# Altium PCB PCB1.PcbDoc
Units mm, origin at the board's own origin, x right, y up, seen from the top; angles counter-clockwise.
Board outline 53.09 x 47.5 mm, 4 copper layers (Top, Int1 (GND), Int2 (PWR), Bottom Layer), stack 1.591 mm thick; 51 components, 39 nets, 191 pads, 70 vias.
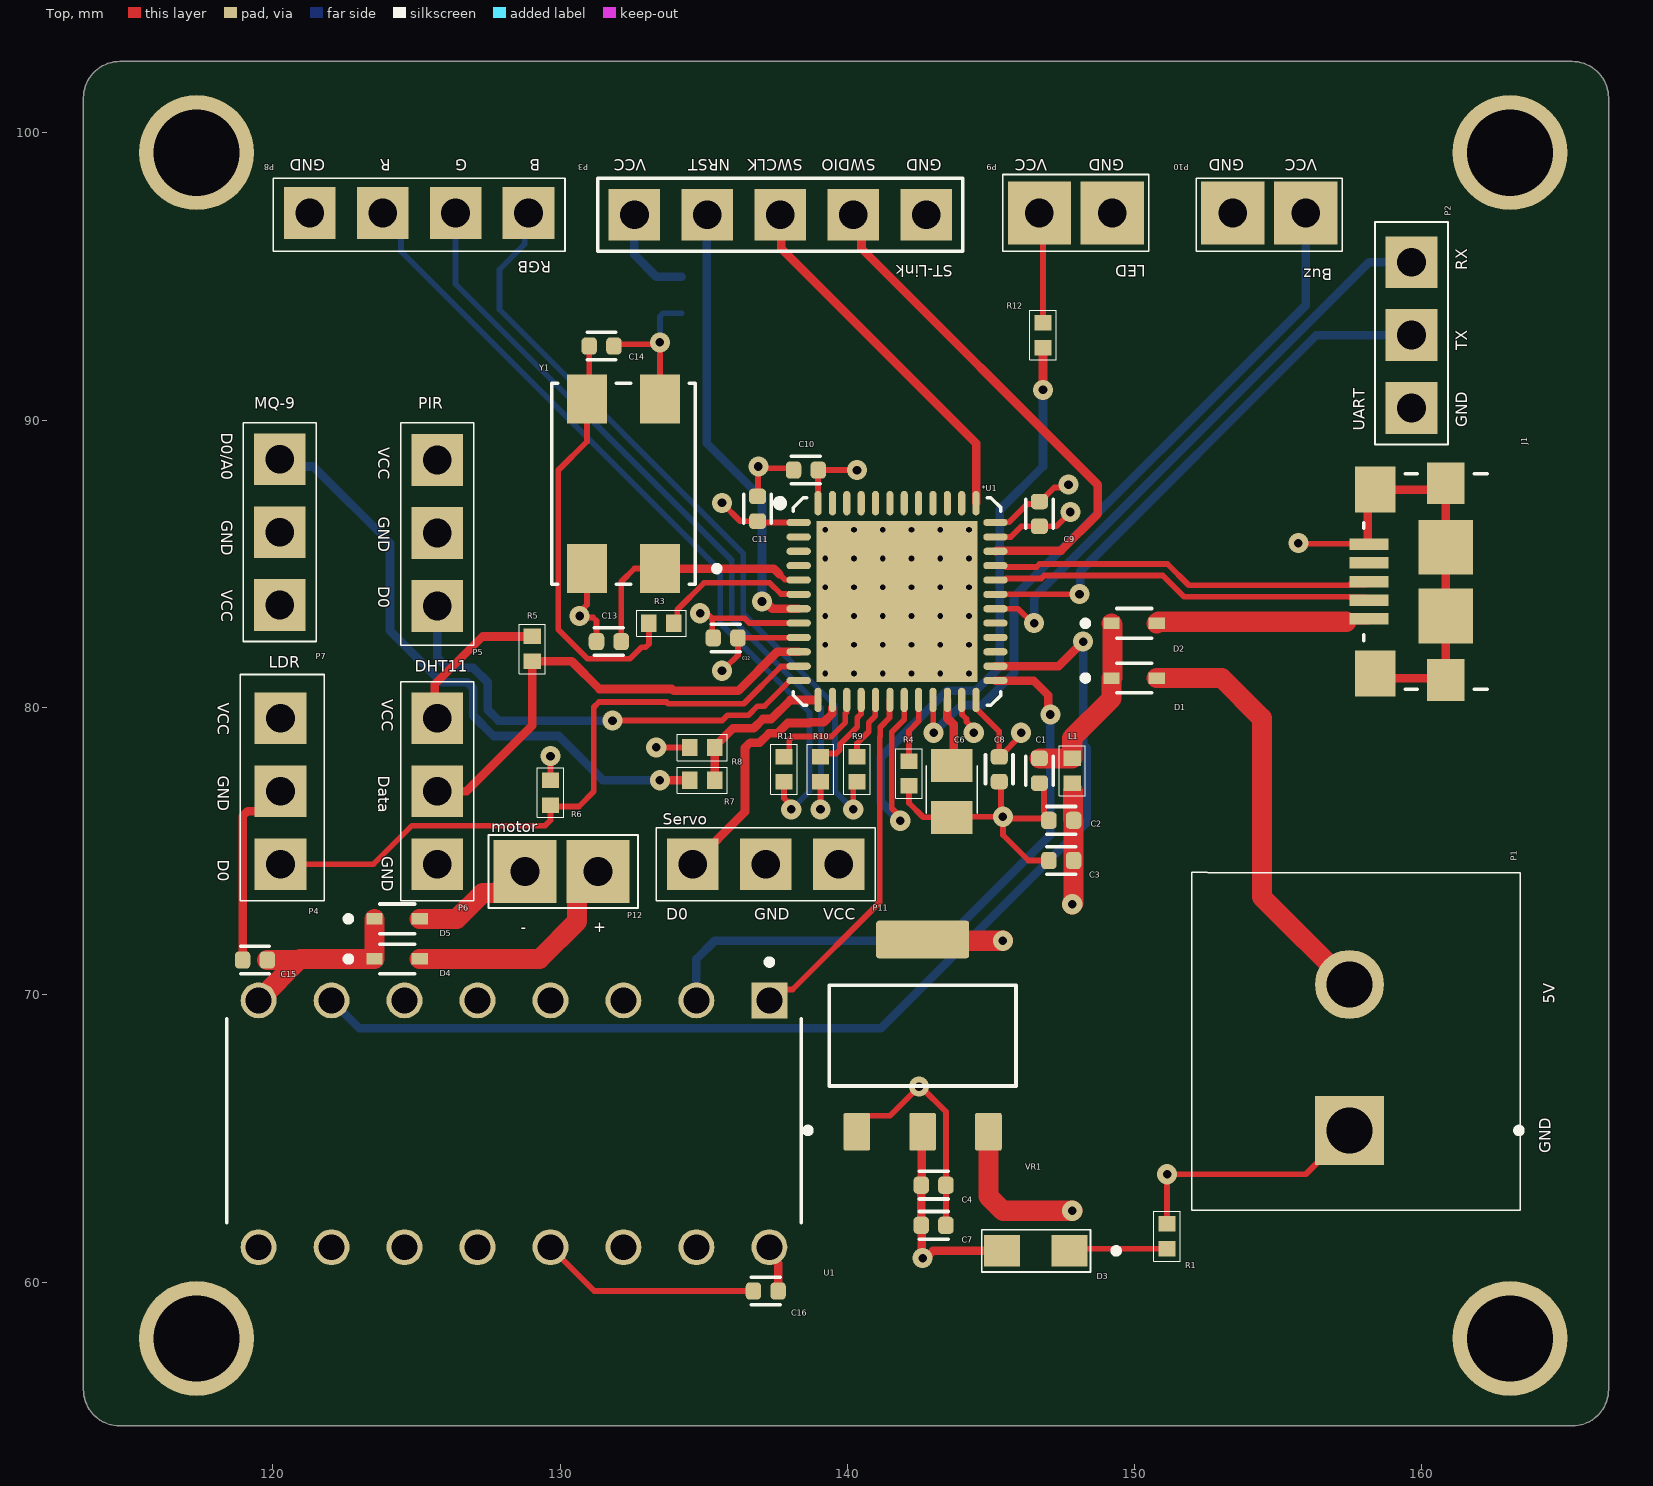
[diagram p0: Top view]
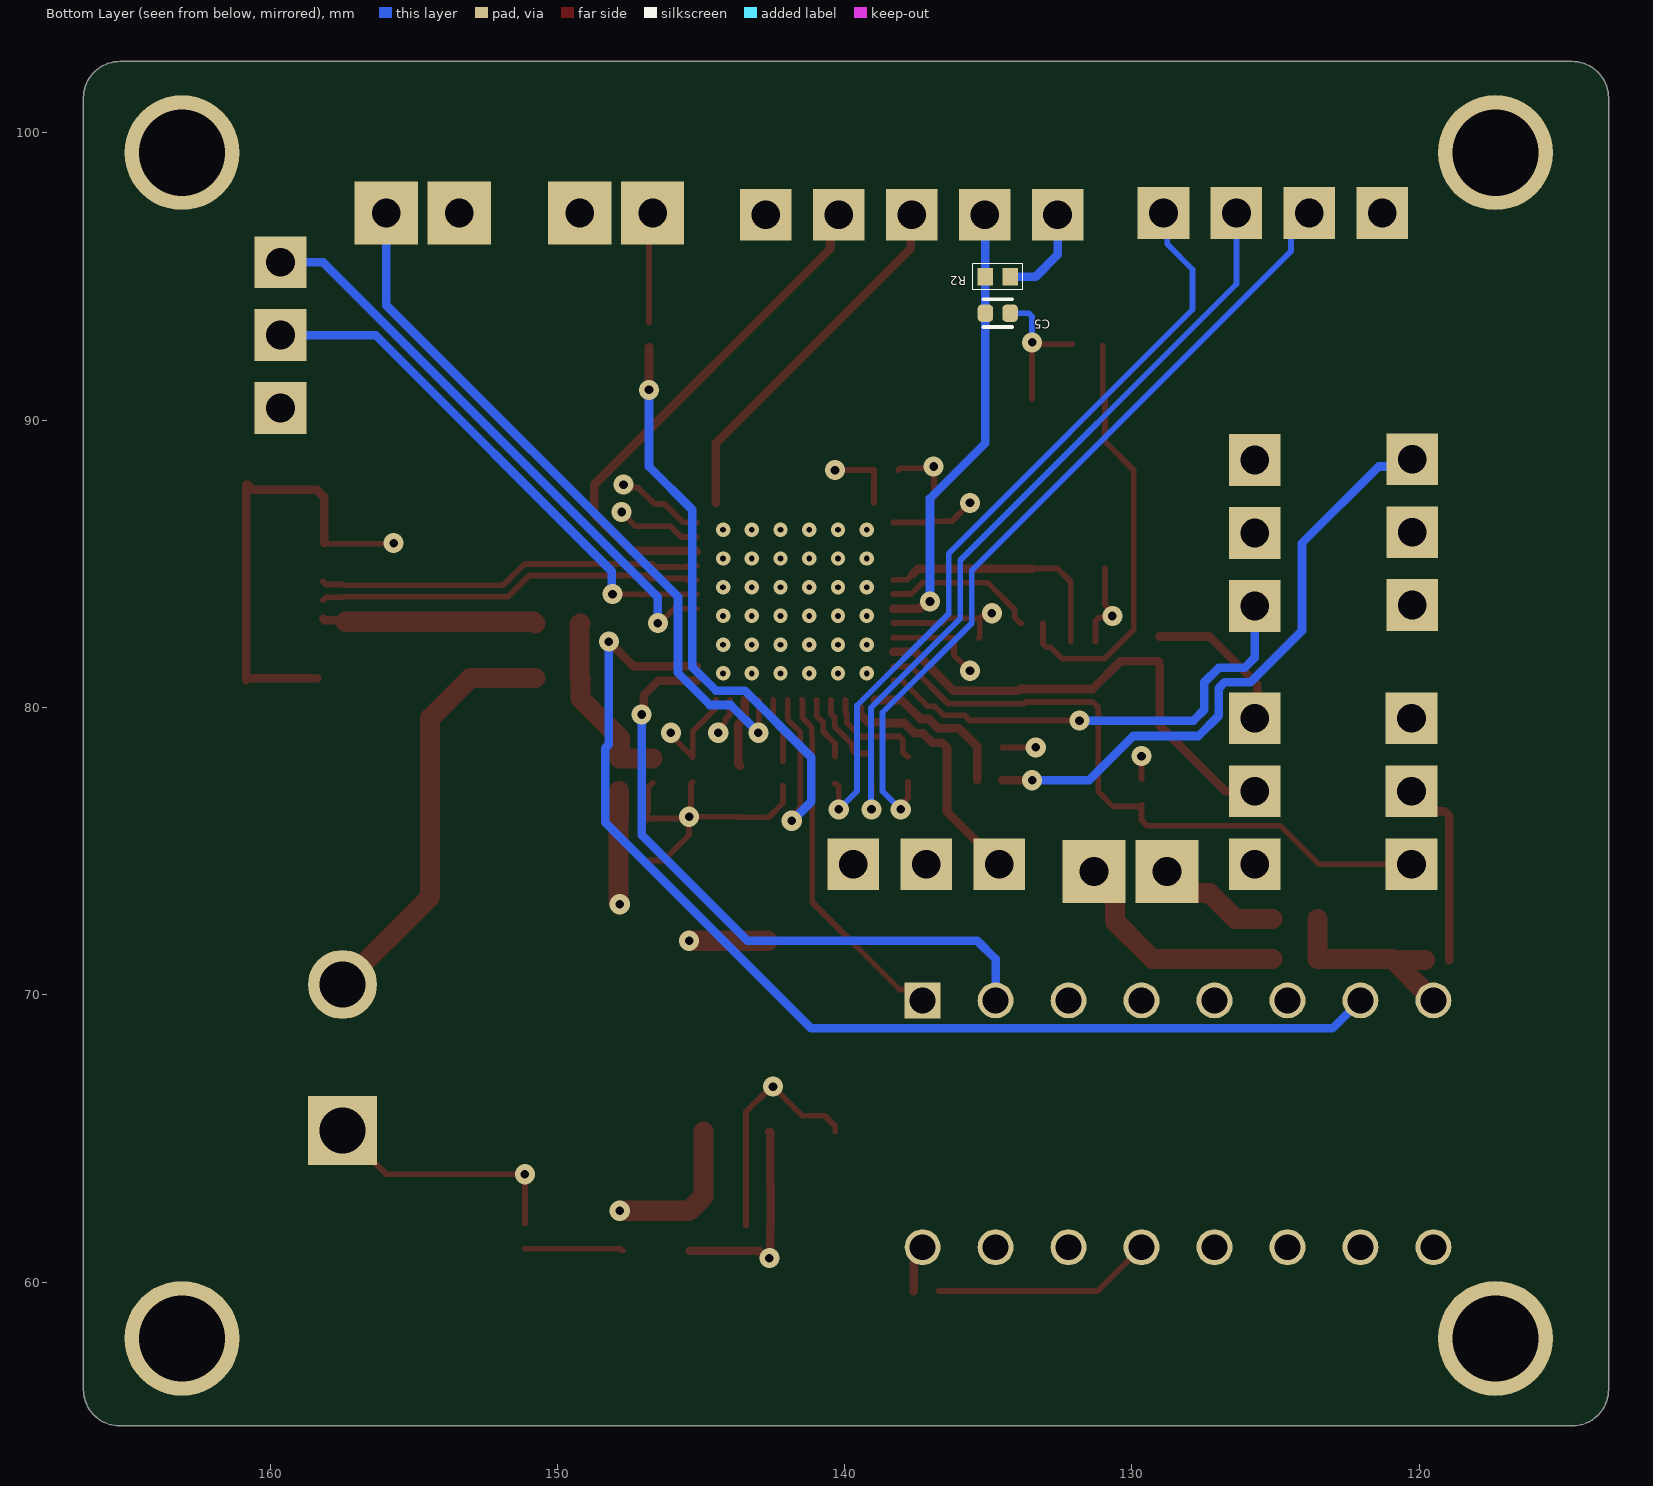
[diagram p1: Bottom Layer view, seen from below]
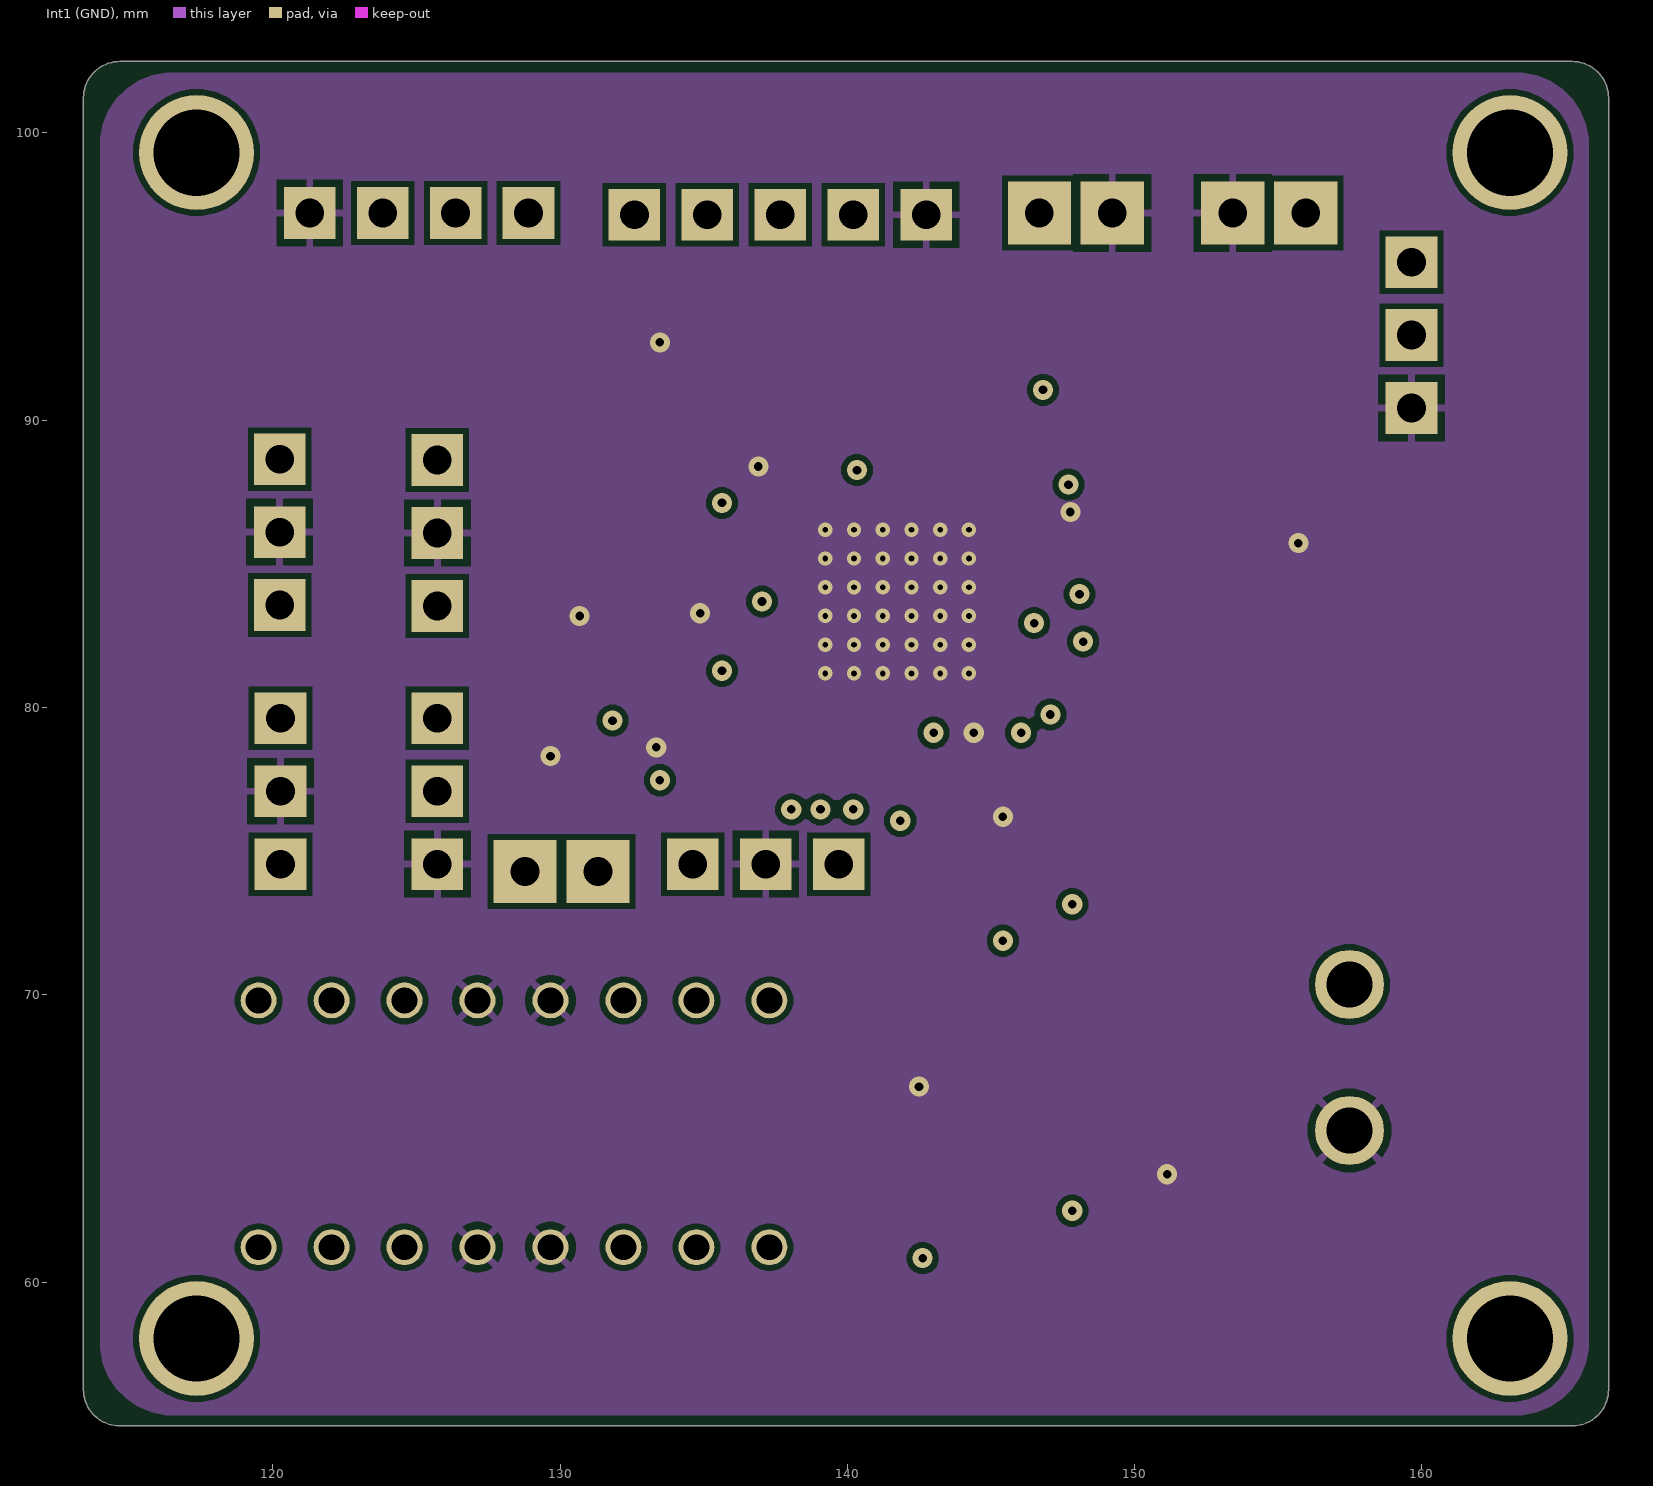
[diagram p2: Int1 (GND)]
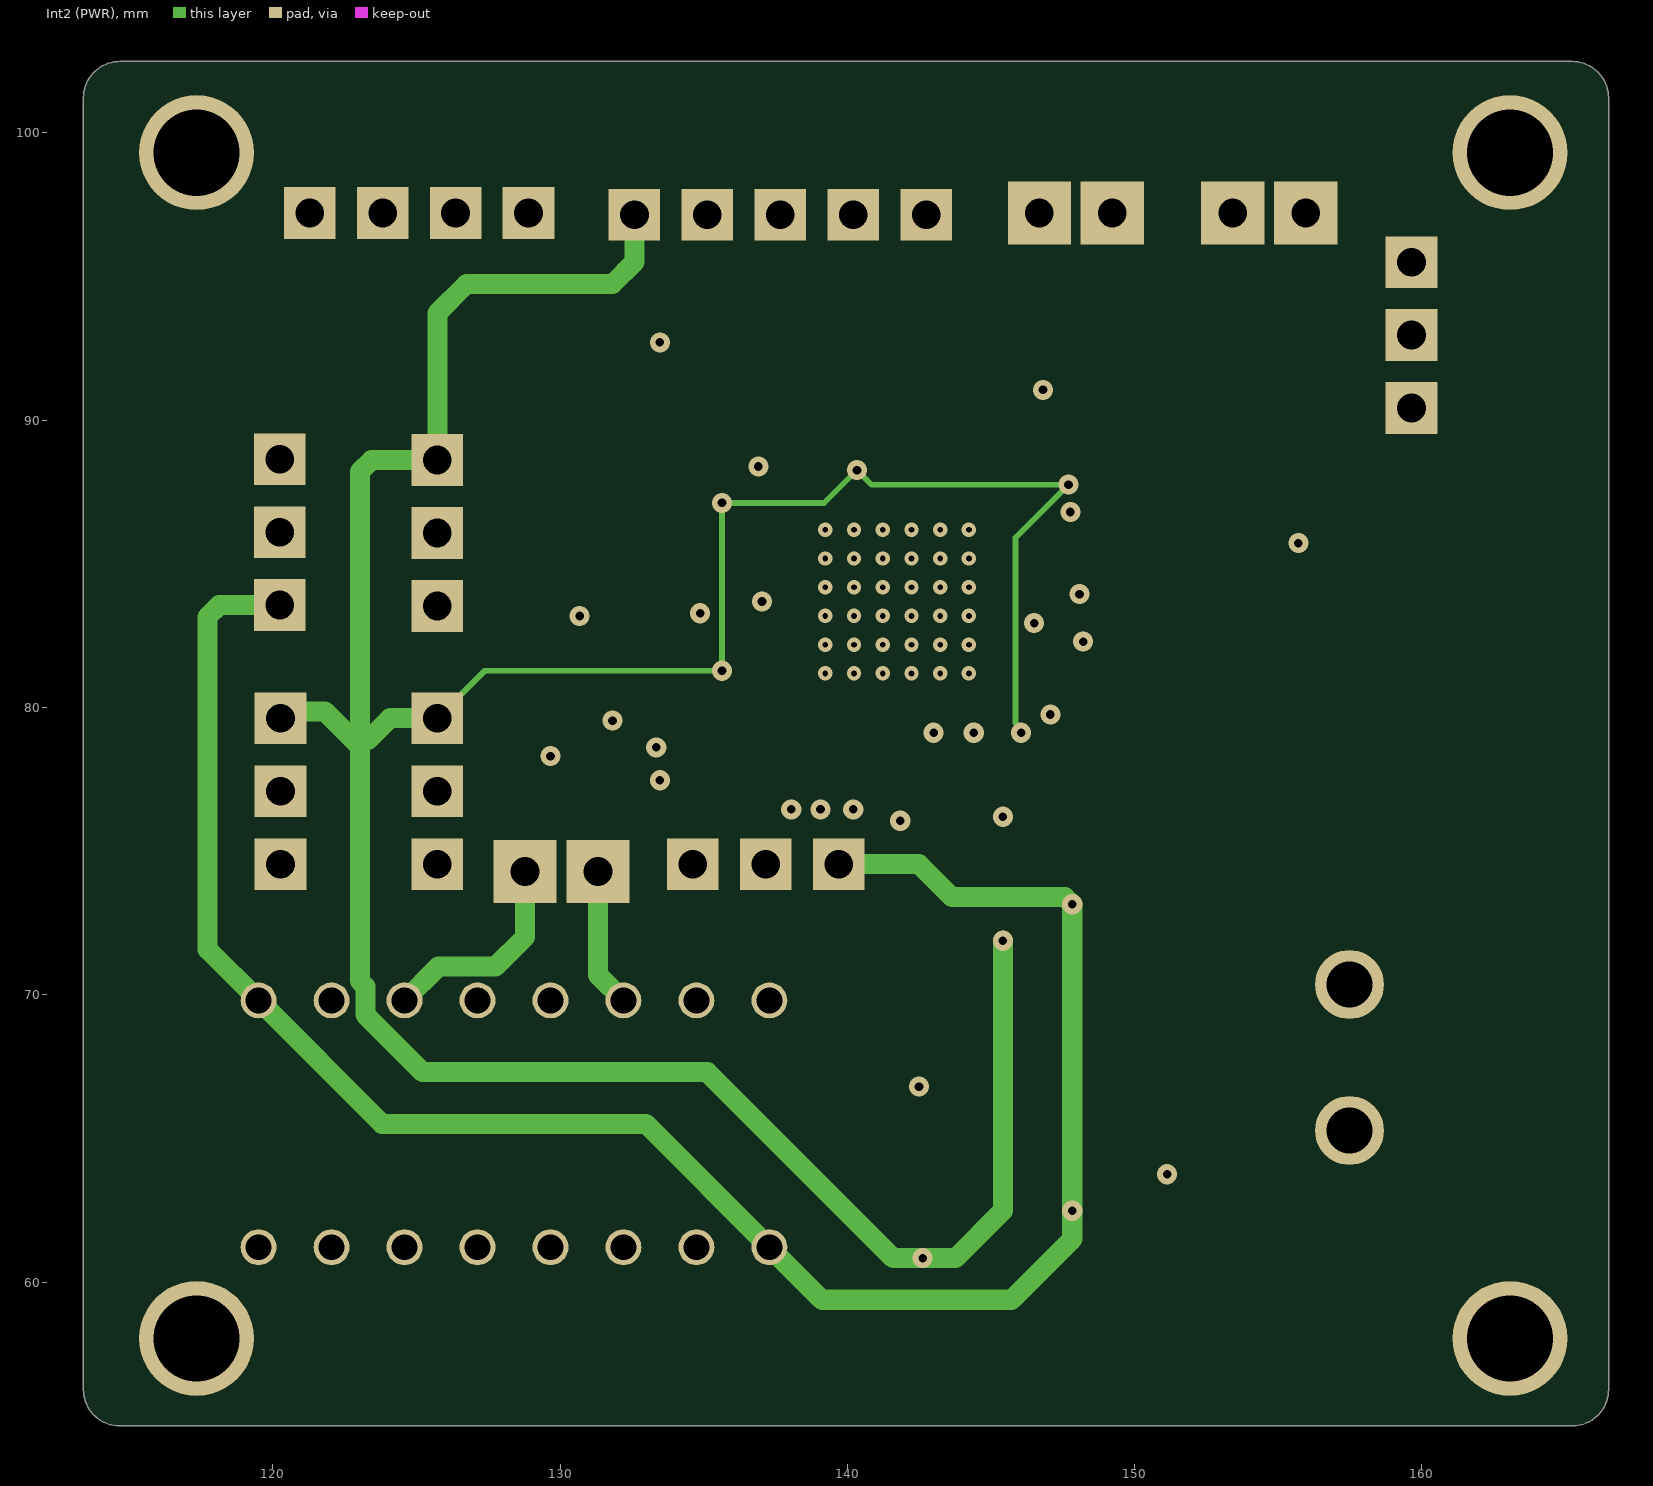
[diagram p3: Int2 (PWR)]
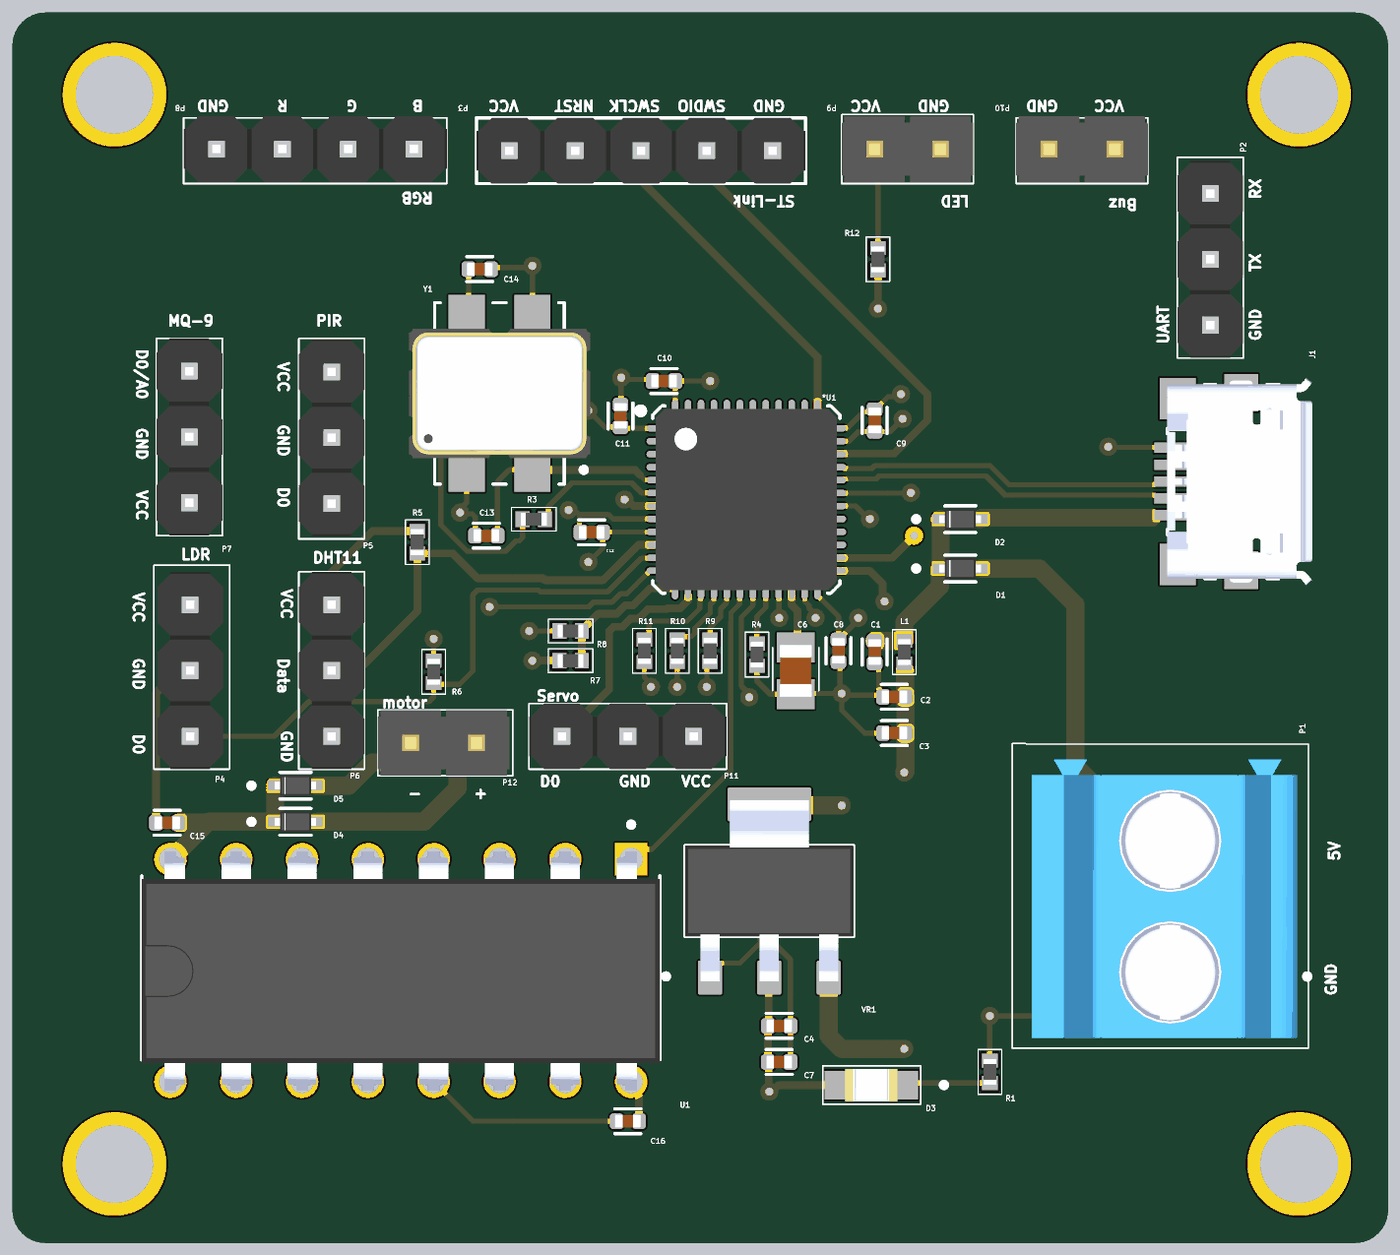
[diagram p4: 3D render of the assembled board from above, using the file's embedded part models]

## Layer stack, top to bottom
Top Solder: solder mask 0.0254, SM-001, Dk 4
Top: signal copper 0.035
Dielectric 2: prepreg 0.2104, PP-017, Dk 4.3
Int1 (GND): signal copper 0.0175
Dielectric 3: core 1.065, Core-039, Dk 4.6
Int2 (PWR): signal copper 0.0175
Dielectric 4: prepreg 0.2104, PP-017, Dk 4.3
Bottom Layer: signal copper 0.035
Bottom Solder: solder mask 0.0254, SM-001, Dk 4

## Board outline
113.411,56.261 113.411,101.219 cw(c114.681,101.219) 114.681,102.489 165.227,102.489 cw(c165.227,101.219) 166.497,101.219 166.497,56.261 cw(c165.227,56.261) 165.227,54.991 114.681,54.991 cw(c114.681,56.261)

## Design rules (kind name [scope] priority, off if disabled: settings)
Clearance Clearance_1 [All] p1: gap=0.2 ignorepadtopadclearanceinfootprint=FALSE
ComponentClearance [All] p1: gap=0.102 collisioncheckmode=3 verticalgap=0.102 showdistances=TRUE
DiffPairsRouting [All] p1: maxlimit=0.2 minlimit=0.2 mostfreqgap=0.2 toplayer_minwidth=0.2 toplayer_maxwidth=0.2 toplayer_prefwidth=0.2 midlayer1_minwidth=0.2 midlayer1_maxwidth=0.2 midlayer1_prefwidth=0.2 midlayer2_minwidth=0.2 midlayer2_maxwidth=0.2 midlayer2_prefwidth=0.2 bottomlayer_minwidth=0.2 bottomlayer_maxwidth=0.2 bottomlayer_prefwidth=0.2 maxuncoupledlength=0.5
Height [All] p1: minheight=0 maxheight=1816.048 prefheight=12.7
HoleSize [All] p1: absolutevalues=TRUE maxlimit=6.3 minlimit=0.2 maxpercent=80.000 minpercent=20.000
HoleToHoleClearance [All] p1: gap=0.25 allowstackedmicrovias=FALSE
MatchedLengths [InDifferentialPair('USB_D')] p1: tolerance=0.5 checknetsindiffpair=FALSE checkdiffpairvsdiffpair=TRUE checkxsignals=TRUE checkothers=TRUE
MinimumAnnularRing [All] p1: minimumring=0.076
MinimumSolderMaskSliver [All] p1: minsoldermaskwidth=0
PlaneClearance [All] p1: clearance=0.102
PlaneConnect PlaneConnectPowerPads [InPadClass('PowerPads')] p1: planeconnectstyle=Direct reliefexpansion=0.508 reliefentries=4 reliefconductorwidth=0.254 reliefairgap=0.254
PlaneConnect [All] p2: pad.planeconnectstyle=Relief pad.reliefexpansion=0.3 pad.reliefentries=4 pad.reliefconductorwidth=0.102 pad.reliefairgap=0.102 via.planeconnectstyle=Direct via.reliefexpansion=0.3 via.reliefentries=4 via.reliefconductorwidth=0.127 via.reliefairgap=0.127
PolygonConnect PolygonConnectPowerPads [All] p1: thpad.connectstyle=Relief thpad.reliefconductorwidth=0.254 thpad.reliefentries=4 thpad.polygonreliefangle="90 Angle" thpad.airgapwidth=0.254 thpad.conductorbypadedge=TRUE thpad.mindistance=0.381 thpad.enablemindistance=FALSE smdpad.connectstyle=Direct smdpad.reliefconductorwidth=0.254 smdpad.reliefentries=4 smdpad.polygonreliefangle="90 Angle" smdpad.airgapwidth=0.254 via.connectstyle=Direct via.reliefconductorwidth=0.254 via.reliefentries=4 via.polygonreliefangle="90 Angle" via.airgapwidth=0.254
PolygonConnect [All] p2: thpad.connectstyle=Relief thpad.reliefconductorwidth=0.102 thpad.reliefentries=4 thpad.polygonreliefangle="90 Angle" thpad.airgapwidth=0.102 smdpad.connectstyle=Relief smdpad.reliefconductorwidth=0.102 smdpad.reliefentries=4 smdpad.polygonreliefangle="90 Angle" smdpad.airgapwidth=0.102 via.connectstyle=Direct via.reliefconductorwidth=0.127 via.reliefentries=4 via.polygonreliefangle="90 Angle" via.airgapwidth=0.127
RoutingVias [All] p1: holewidth=0.3 width=0.7 viastyle="Through Hole" minholewidth=0.15 minwidth=0.25 maxholewidth=0.3 maxwidth=0.7
SilkToSilkClearance [All] p1 off: silktosilkclearance=0.254
SilkToSolderMaskClearance [IsPad] p1 off: minsilkscreentomaskgap=0.254 clearancetoexposedcopper=TRUE
SolderMaskExpansion [All] p1: expansion=0.075 istentingtop=FALSE
SupplyNets "Schematic Supply Nets_3" [InNet('VBUS')] p1: voltage=0.000
SupplyNets "Schematic Supply Nets_2" [InNet('+3V3')] p2: voltage=0.000
SupplyNets "Schematic Supply Nets_1" [InNet('+5V')] p3: voltage=0.000
SupplyNets "Schematic Supply Nets" [InNet('GND')] p4: voltage=0.000
Width [All] p1: maxlimit=0.7 minlimit=0.2 preferedwidth=0.3
20 further rules are at their usual default settings.

## Classes and differential pairs
component class Sensors: P4 P5 P6 P7 R5 R6 R7 R8
component class Power: C1 C2 C3 C4 D1 D2 D3 J1 L1 P1 R1 VR1
component class Microcontroller: *U1 C5 C6 C7 C8 C9 C10 C11 C12 C13 C14 P2 P3 R2 R3 R4 Y1
component class Actuators: C15 C16 D4 D5 P8 P9 P10 P11 P12 R9 R10 R11 R12 U1
differential pair USB_D: +USB_D_P -USB_D_N

## Components (designator, comment, footprint, x,y, rotation, side; value= is the part's Value field where it differs from the comment)
*U1 "STM32F401CEU6" UFQFPN-48_7x7mm_P0.5mm 141.732,83.689 r0 top
C1 "2.2uF" CAPC1005X55N 146.685,77.802 r270 top
C2 "100nF" CAPC1005X55N 147.447,76.073 r180 top
C3 "22uF" CAPC1005X55N 147.447,74.676 r180 top
C4 "22uF" CAPC1005X55N 143.002,63.373 r0 top
C5 "100nF" CAPC1005X55N 134.671,93.726 r180 bottom
C6 "2.2uF" CAPC2012X140N 143.637,77.078 r90 top
C7 "2.2uF" CAPC1005X55N 143.002,61.976 r0 top
C8 "100nF" CAPC1005X55N 145.288,77.851 r270 top
C9 "100nF" CAPC1005X55N 146.685,86.741 r90 top
C10 "100nF" CAPC1005X55N 138.557,88.265 r180 top
C11 "100nF" CAPC1005X55N 136.877,86.917 r90 top
C12 "100nF" CAPC1005X55N 135.763,82.423 r180 top
C13 "22pF" CAPC1005X55N 131.699,82.296 r180 top
C14 "22pF" CAPC1005X55N 131.445,92.583 r0 top
C15 "100nF" CAPC1005X55N 119.38,71.212 r180 top
C16 "100nF" CAPC1005X55N 137.16,59.69 r180 top
D1 "100V" Schottky.D 149.987,81.026 r0 top
D2 "100V" Schottky.D 149.987,82.931 r0 top
D3 "Green LED 0805" LED_APT2012MGC 146.558,61.087 r180 top
D4 "100V" Schottky.D 124.333,71.247 r0 top
D5 "100V" Schottky.D 124.333,72.644 r0 top
J1 "micro usb surface mount" TE_1981568-1 160.83,84.385 r90 top
L1 "FB-120R-0402" RESC1005X40N 147.828,77.8 r270 top
P1 "5,08mm" Screw_terminal_block_5.0 163.551,61.011 r90 top
P2 "DHT11" "HEADER 1x3 MALE" 159.639,90.424 r270 top
P3 "Header 1x5" "Header 1x5 male" 137.668,97.155 r180 top
P4 "LDR" "HEADER 1x3 MALE" 120.269,74.549 r270 top
P5 "PIR" "HEADER 1x3 MALE" 125.73,83.536 r270 top
P6 "DHT11" "HEADER 1x3 MALE" 125.73,74.549 r270 top
P7 "MQ9" "HEADER 1x3 MALE" 120.239,88.646 r90 top
P8 "RGB" "Header 1x4 male" 123.825,97.218 r180 top
P9 "Header 1x2-LED" "Header 1x2" 146.685,97.217 r0 top
P10 "Header 1x2-Buzzer" "Header 1x2" 155.956,97.217 r180 top
P11 "servo" "HEADER 1x3 MALE" 134.62,74.549 r180 top
P12 "Header 1x2-DC Motor" "Header 1x2" 131.318,74.295 r180 top
R1 "Resistor_1K_0402" RESC1005X40N 151.13,61.595 r270 top
R2 "Resistor_10K_0402" RESC1005X40N 134.671,94.996 r180 bottom
R3 "Resistor_0ohm_0402" RESC1005X40N 133.528,82.931 r0 top
R4 "Resistor_10K_0402" RESC1005X40N 142.143,77.704 r270 top
R5 "Resistor_10K_0402" RESC1005X40N 129.032,82.042 r90 top
R6 "Resistor_10K_0402" RESC1005X40N 129.667,77.038 r270 top
R7 "Resistor_2.2K_0402" RESC1005X40N 134.95,77.47 r180 top
R8 "Resistor_3.3K_0402" RESC1005X40N 134.95,78.613 r0 top
R9 "Resistor_330_0402 x4" RESC1005X40N 140.335,77.851 r270 top
R10 "Resistor_330_0402" RESC1005X40N 139.065,77.851 r270 top
R11 "Resistor_330_0402" RESC1005X40N 137.795,77.851 r270 top
R12 "Resistor_330_0402" RESC1005X40N 146.812,92.964 r90 top
U1 "L293D" DIP880W50P254L2000H510Q16 128.397,65.614 r270 top
VR1 "3.3V" SOT229P700X180-4N 142.621,68.58 r0 top
Y1 "Crystal 24MHz" XTAL_C7S-24.000-12-3030-X-R 132.207,87.786 r180 top

## Footprints (in the part's own frame and the unit in brackets; to place one, negate y for a bottom-side part, rotate by r counter-clockwise, add the part's x,y. Pads: shape width x height; smd on the part's side, far side on the other; paste and mask are expansions set on the pad)
CAPC1005X55N [mm]
  rrect53% 0.54x0.6 smd: 1(-0.43,0) 2(0.43,0)
  silkscreen extent -0.5,-0.48 0.5,0.48, body extent -0.5,-0.25 0.5,0.25, height 0.55
CAPC2012X140N [mm]
  rect 1.15x1.45 smd: 1(-0.9,0) 2(0.9,0)
  silkscreen extent -0.76,-0.89 0.89,0.89, body extent -1,-0.63 1,0.63, height 0.94
DIP880W50P254L2000H510Q16 [mm]
  rect 1.25x1.25 / inner round 1.25 / far side rect 1.25x1.25 hole 0.9: 1(-4.191,8.89)
  round 1.25 hole 0.9: 2(-4.191,6.35) 3(-4.191,3.81) 4(-4.191,1.27) 5(-4.191,-1.27) 6(-4.191,-3.81) 7(-4.191,-6.35) 8(-4.191,-8.89) 9(4.4,-8.89) 10(4.4,-6.35) 11(4.4,-3.81) 12(4.4,-1.27) 13(4.4,1.27) 14(4.4,3.81) 15(4.4,6.35) 16(4.4,8.89)
  silkscreen extent -5.62,-10 3.55,10, body extent -4.49,-10 4.75,10, height 5.1
"Header 1x2" [mm] "2.54mm"
  rect 2.2x2.2 hole 1: 1(0,0) 2(2.54,0)
  body extent -1.27,-1.27 3.81,1.27, height 8.6
"HEADER 1x3 MALE" [mm] "2.54mm"
  rect 1.8x1.8 hole 1: 1(-5.08,0) 2(-2.54,0) 3(0,0)
  body extent -6.35,-1.27 1.27,1.27, height 8.6
"Header 1x4 male" [mm] "2.54mm"
  rect 1.8x1.8 hole 1: 1(-5.08,0) 2(-2.54,0) 3(0,0) 4(2.54,0)
  body extent -6.35,-1.27 3.81,1.27, height 8.6
"Header 1x5 male" [mm] "2.54mm"
  rect 1.8x1.8 hole 1: 1(-5.08,0) 2(-2.54,0) 3(0,0) 4(2.54,0) 5(5.08,0)
  silkscreen extent -6.35,-1.27 6.35,1.27, body extent -6.35,-1.27 6.35,1.27, height 8.6
LED_APT2012MGC [mm]
  rect 1.25x1.1 smd: A(1.175,0) C(-1.175,0)
  silkscreen extent -2.9,-0.74 1.88,0.74, body extent -1,-0.63 1,0.63, height 0.75
RESC1005X40N [mm]
  rect 0.54x0.6 smd paste+0 mask+0.102: 1(-0.432,0) 2(0.432,0)
  silkscreen extent -0.86,-0.46 0.86,0.46, body extent -0.5,-0.25 0.5,0.25, height 0.4
Schottky.D [mm]
  rect 0.56x0.4 smd: 1(0.785,0) 2(-0.785,0)
  silkscreen extent -1.8,-0.52 0.6,0.52, body extent -0.8,-0.4 0.8,0.4, height 0.65
Screw_terminal_block_5.0 [mm]
  rect 2.4x2.4 / inner round 2.4 / far side rect 2.4x2.4 hole 1.6: 1(4.267,6.071)
  round 2.4 hole 1.6: 2(9.347,6.071)
  silkscreen extent 1.5,0.07 13.26,11.56, body extent 1.88,0.56 12.64,10.81, height 14
SOT229P700X180-4N [mm]
  rrect15% 0.93x1.31 smd: 1(-2.29,-3.345) 2(0,-3.345) 3(2.29,-3.345)
  rrect15% 3.24x1.31 smd: 1(0,3.345)
  silkscreen extent -4.09,-3.4 3.25,1.75, body extent -3.25,-3.5 3.25,3.5, height 1.8
TE_1981568-1 [mm]
  rect 0.4x1.35 smd: 1(-1.3,2.675) 2(-0.65,2.675) 3(0,2.675) 4(0.65,2.675) 5(1.3,2.675)
  rect 1.6x1.4 smd: SH1(-3.2,2.45) SH2(3.2,2.45)
  rect 1.45x1.3 smd: SH3(3.425,0) SH6(-3.425,0)
  rect 1.9x1.9 smd: SH4(1.2,0) SH5(-1.2,0)
  silkscreen extent -3.75,-1.45 3.75,2.85, body extent -4,-2.75 4,2.85, height 2.81
UFQFPN-48_7x7mm_P0.5mm [mm] "QFN, 48-Leads, Body 7.00x7.00mm, Pitch 0.50mm, Thermal Pad 5.60x5.60mm, IPC Medium Density"
  oval 0.85x0.25 smd: 1(-3.425,2.75) 2(-3.425,2.25) 3(-3.425,1.75) 4(-3.425,1.25) 5(-3.425,0.75) 6(-3.425,0.25) 7(-3.425,-0.25) 8(-3.425,-0.75) 9(-3.425,-1.25) 10(-3.425,-1.75) 11(-3.425,-2.25) 12(-3.425,-2.75) 25(3.425,-2.75) 26(3.425,-2.25) 27(3.425,-1.75) 28(3.425,-1.25) 29(3.425,-0.75) 30(3.425,-0.25) 31(3.425,0.25) 32(3.425,0.75) 33(3.425,1.25) 34(3.425,1.75) 35(3.425,2.25) 36(3.425,2.75)
  oval 0.25x0.85 smd: 13(-2.75,-3.425) 14(-2.25,-3.425) 15(-1.75,-3.425) 16(-1.25,-3.425) 17(-0.75,-3.425) 18(-0.25,-3.425) 19(0.25,-3.425) 20(0.75,-3.425) 21(1.25,-3.425) 22(1.75,-3.425) 23(2.25,-3.425) 24(2.75,-3.425) 37(2.75,3.425) 38(2.25,3.425) 39(1.75,3.425) 40(1.25,3.425) 41(0.75,3.425) 42(0.25,3.425) 43(-0.25,3.425) 44(-0.75,3.425) 45(-1.25,3.425) 46(-1.75,3.425) 47(-2.25,3.425) 48(-2.75,3.425)
  rect 5.6x5.6 smd paste-2.8: 49(0,0)
  silkscreen extent -4.2,-3.61 3.61,3.61, body extent -3.5,-3.5 3.5,3.5, height 0.55
XTAL_C7S-24.000-12-3030-X-R [mm]
  rect 1.4x1.7 smd: 1(-1.27,2.95) 2(-1.27,-2.95) 3(1.27,-2.95) 4(1.27,2.95)
  silkscreen extent -3.35,-3.5 2.5,3.5, body extent -2.5,-3.5 2.5,3.5, height 1.1

## Part data
*U1: "ARM Cortex-M4 32b MCU+FPU,105DMIPS,512KB Flash/96KB RAM, 11 TIMs, 1 ADC, 11 comm. interfaces", Manufacturer=ST, ComponentLink1Description="Data Sheet", ComponentLink1URL=https://www.lcsc.com/datasheet/C60420.pdf?spm=wm.sxq.inf.ggs___wm.fly.bg.0.stp&lcsc_vid=E1QPAlFSFlQNAwEAEQJdBlJfE1hWVlFUQlIPUgAERAIxVlNeQFNcV1NSTlNaUDsOAxUeFF5JWBYZEEoKFBINSQcJGk4%3D, Manufacturer Part#=STM32F401CEU6, Supplier=LCSC, Supplier Part#=C60420
C1 C7: library part Cap_2.2uF_0402, "CAP CER 2.2uF 16V X5R 0402", Manufacturer="Samsung Electro-Mechanics", Manufacturer Part #=CL05A225KO5NQNC, ComponentLink1Description="Data Sheet", ComponentLink1URL=https://www.lcsc.com/datasheet/C170151.pdf?spm=wm.sxq.inf.ggs___wm.fly.bg.3.stp&lcsc_vid=T1MKV1cAE1gLBAVfTgIKUgJfTlkPBQBVQlMMBAJURwAxVlNeT1dfVlxVQ1ReXzsOAxUeFF5JWBYZEEoKFBINSQcJGk4%3D, Supplier=LCSC, Supplier Part#=C170151
C2 C5 C8 C9 C10 C11 C12 C15 C16: library part Cap_100nF_0402, "CAP CER 100nF 16V X7R 0402", Manufacturer="Samsung Electro-Mechanics", Manufacturer Part #=CL05B104KO5NNNC, ComponentLink1Description="Data Sheet", ComponentLink1URL=https://www.lcsc.com/datasheet/C1525.pdf?spm=wm.sxq.inf.ggs___wm.fly.bg.1.stp&lcsc_vid=T1MKV1cAE1gLBAVfTgIKUgJfTlkPBQBVQlMMBAJURwAxVlNeT1dfVlxVQ1ReXzsOAxUeFF5JWBYZEEoKFBINSQcJGk4%3D, Supplier=LCSC, Supplier Part#=C1525
C3 C4: library part Cap_22uF_0402, "CAP CER 22uF 6.3V X5R 0402", Manufacturer="Samsung Electro-Mechanics", Manufacturer Part #=CL05A226MQ5QUNC, ComponentLink1Description="Data Sheet", ComponentLink1URL=https://www.lcsc.com/datasheet/C105226.pdf?spm=wm.sxq.inf.ggs___wm.fly.bg.3.stp&lcsc_vid=T1MKV1cAE1gLBAVfTgIKUgJfTlkPBQBVQlMMBAJURwAxVlNeT1dfVlxVQ1ReXzsOAxUeFF5JWBYZEEoKFBINSQcJGk4%3D, Supplier=LCSC, Supplier Part#=C105226
C6: library part Cap_0805_2u2F, "CAP CER 2.2uF 16V X7R 0805", Manufacturer="Samsung Electro-Mechanics", Manufacturer Part#=CL21B225KOFNNNE, ComponentLink1Description="Data Sheet", ComponentLink1URL=https://www.lcsc.com/datasheet/C28234.pdf?spm=wm.sxq.inf.ggs___wm.fly.bg.7.stp&lcsc_vid=RlgPBF0EEVEPX1ZVRAVZVwcHRVJaBVJSTlNXAgBWFlkxVlNeQFFbX1RVRFRaVTsOAxUeFF5JWBYZEEoBGA4JCwFIFA4DSA%3D%3D, Supplier=LCSC, Supplier Part#=C28234
C13 C14: library part Cap_22pF_0402, "CAP CER 22pF 50V NP0 0402", Manufacturer=YAGEO, Manufacturer Part #=CC0402JRNPO9BN220, ComponentLink1Description="Data Sheet", ComponentLink1URL=https://www.lcsc.com/datasheet/C106203.pdf?spm=wm.sxq.inf.ggs___wm.fly.bg.0.stp&lcsc_vid=RFgKVFNTRgJeV1xfTlldBAVTQANbU1dQTgBXBVEDElgxVlNeT1ZZU1VQQ1ZZXztW, Supplier=LCSC, Supplier Part#=C106203
D1 D2 D4 D5: library part Schottky_D, "100V 850mV@5A 5A SMAG Schottky Diodes ROHS", Manufacturer=Nexperia, Mfr. Part #=BAT54S,215, ComponentLink1Description="New link", ComponentLink1URL=https://www.lcsc.com/product-detail/C466506.html?s_z=n_schottky%2520diode, Splr.part#=C466506, Supplier=LCSC
D3: "LED GREEN 0805 SMD", Manufacturer=NATIONSTAR, Manufacturer Part#=NCD0805G1, ComponentLink1Description="Data Sheet", ComponentLink1URL=https://www.lcsc.com/datasheet/C84260.pdf?spm=wm.sxq.inf.ggs___wm.fly.bg.0.stp&lcsc_vid=FVIKU1JeEVJYVVVSQVdZUQJSQlYKVAJXRwQLV1VXQlYxVlNeQVdfUV1TQ1ReXzsOAxUeFF5JWBYZEEoKFBINSQcJGk4NBhADEA4cHktXRlVcSQwSGg0%3D, Supplier=LCSC, Supplier Part#=C84260
J1: "MICRO USB, TYPE B,", Manufacturer=HMTCONN, Manufacturer Part#="HMT-MICRO USB 4P", ComponentLink1Description="Data Sheet", ComponentLink1URL=https://www.lcsc.com/datasheet/C53121381.pdf?spm=wm.sxq.inf.ggs___wm.ssy.bg.2.stp&lcsc_vid=RlgPBF0EEVEPX1ZVRAVZVwcHRVJaBVJSTlNXAgBWFlkxVlNeQFFbX1NTQ1dfVzsOAxUeFF5JWBYZEEoKFBINSQcJGk4eFQsCAgIaSgADAwAHC0slT1VdUFJIHxUDCw%3D%3D, Supplier=LCSC, Supplier Part#=C53121381
L1: "FERRITE BEAD 120Ω 0402", Manufacturer=KOHERelec, Manufacturer Part#=FBHA0402-121-202R, ComponentLink1Description="Data Sheet", ComponentLink1URL=https://www.lcsc.com/datasheet/C41355350.pdf?spm=wm.sxq.inf.ggs___wm.fly.bg.5.stp&lcsc_vid=T1MKV1cAE1gLBAVfTgIKUgJfTlkPBQBVQlMMBAJURwAxVlNeT1dcVldXR1JYUjsOAxUeFF5JWBYZEEoKFBINSQcJGk4NBhADEA4cHktXRlZeSQwSGg0%3D, Supplier=LCSC, Supplier Part#=C41355350
P1: library part "screw terminal block 2 port", "1x2P 18A -40℃~+105℃ 250V Green 14~30 Through Hole 5.08mm 2.5 1 2 Through Hole,P=5.08mm Screw Terminal Blocks ROHS", Manufacturer=KANGNEX, Mfr. Part #=WJ500V-5.08-2P, ComponentLink1Description="New link", ComponentLink1URL=https://www.lcsc.com/product-detail/C8465.html, Splr.part#=C8465, Supplier=LCSC
P2: library part UART, ComponentLink1Description=Link
P4: library part "Header 1x3-LDR", "The LDR Light Sensor Module detects light intensity, with resistance decreasing as light increases. Ideal for automatic lighting and brightness sensing.", ComponentLink1Description=Link, ComponentLink1URL=https://makerselectronics.com/product/ldr-light-sensor-module/, Supplier="Makers Electronics", Supplier Part#=300000009413
P5: library part "Header 1x3-PIR", "AM312  is a compact PIR motion sensor (HW-740) that detects motion up to 5 m with ultra-low power consumption for battery-powered projects.automatic lighting and brightness sensing.", ComponentLink1Description=Link, ComponentLink1URL=https://makerselectronics.com/product/am312-mini-pir-motion-sensor-module/, Supplier="Makers Electronics", Supplier Part#=3496300110674
P6: library part "Header 1x3-DHT Temp", "DHT11 Temperature Humidity Sensor Board measures temperature (0–50°C) and humidity (20–90%) with digital output, ideal for weather monitoring, IoT, automation.", ComponentLink1Description=Link, ComponentLink1URL=https://makerselectronics.com/product/dht11-board/, Supplier="Makers Electronics", Supplier Part#=300000009298
P7: library part "Header 1x3-MQ9", "MQ-9 is a compact and versatile gas sensor module for detecting carbon monoxide and combustible gases.", ComponentLink1Description=Link, ComponentLink1URL=https://makerselectronics.com/product/mq-9-carbon-monoxide-gas-sensor/, Supplier="Makers Electronics", Supplier Part#=300000009267
P8: library part "Header 1x4-RGB_LED", "HW-479 is a versatile RGB LED module with PWM control for vibrant color mixing, ideal for Arduino and microcontroller projects.", ComponentLink1Description=Link, ComponentLink1URL=https://makerselectronics.com/product/hw-479-rgb-led-module/, Supplier="Makers Electronics", Supplier Part#=5597455270331
P9: "Round Transparent LED 3mm 2Pin available in blue and red colors is Bright and efficient, ideal for indicators, DIY electronics, and display applications.", ComponentLink1Description=Link, ComponentLink1URL=https://makerselectronics.com/product/round-transparent-led-3mm-2pin/, Supplier="Makers Electronics"
P10: "SFM-20B Piezo Buzzer Alarm 3-24VDC 95dB 23x12mm is a compact, active piezoelectric alarm buzzer for continuous audible alerts in low‑voltage DC systems.", ComponentLink1Description=Link, ComponentLink1URL=https://makerselectronics.com/product/sfm-20b-piezo-buzzer-alarm-3-24vdc-95db-23x12mm/, Supplier="Makers Electronics", Supplier Part#=3496300135059
P11: library part "Header 1x3-Servo", "servo-180-degree/", ComponentLink1Description=Link, ComponentLink1URL=https://makerselectronics.com/product/sg90-micro-servo-180-degree/, Supplier="Makers Electronics", Supplier Part#=300000009139
P12: "Compact OSEPP LS-00027 R280 brushed DC motor. Features 3-6V operation and a 2mm shaft. Ideal for robotics, DIY hobbies, and educational science projects.", ComponentLink1Description=Link, ComponentLink1URL=https://makerselectronics.com/product/osepp-12000-rpm-dc-motor/, Supplier="Makers Electronics", Supplier Part#=667510001714
R1: "1kOhms Â±1% 0.063W, 1/16W Chip Resistor 0402 (1005 Metric) Moisture Resistant Thick Film", Manufacturer=FOJAN, Manufacturer Part #=RC0402FR-071KL, ComponentLink1Description="Data Sheet", ComponentLink1URL=https://www.lcsc.com/datasheet/C106235.pdf?spm=wm.sxq.inf.ggs___wm.fly.bg.2.stp&lcsc_vid=T1MKV1cAE1gLBAVfTgIKUgJfTlkPBQBVQlMMBAJURwAxVlNeT1dcVlJVRFlZVzsOAxUeFF5JWBYZEEoKFBINSQcJGk4NBhADEA4cHktXRlhXSQwSGg0%3D, Supplier=LCSC, Supplier Part #=C106235
R2 R4 R5 R6: "RES 10kΩ ±1% 62.5mW 0402", Manufacturer=YAGEO, Manufacturer Part #=RC0402FR-0710KL, ComponentLink1Description="Data Sheet", ComponentLink1URL=https://www.lcsc.com/datasheet/C60490.pdf?spm=wm.sxq.inf.ggs___wm.fly.bg.1.stp&lcsc_vid=T1MKV1cAE1gLBAVfTgIKUgJfTlkPBQBVQlMMBAJURwAxVlNeT1dcVVBSRVlfUDsOAxUeFF5JWBYZEEoKFBINSQcJGk4NBhADEA4cHktXRlhXSQwSGg0%3D, Supplier=LCSC, Supplier Part #=C60490
R3: "RES 0Ω 0.1W 0402", Manufacturer=PANASONIC, Manufacturer Part #=ERJ2GE0R00X, ComponentLink1Description="Data Sheet", ComponentLink1URL=https://www.lcsc.com/datasheet/C242160.pdf?spm=wm.sxq.inf.ggs___wm.fly.bg.1.stp&lcsc_vid=T1MKV1cAE1gLBAVfTgIKUgJfTlkPBQBVQlMMBAJURwAxVlNeT1dcVF1TR1RYVzsOAxUeFF5JWBYZEEoKFBINSQcJGk4NBhADEA4cHktXRlhXSQwSGg0%3D, Supplier=LCSC, Supplier Part #=C242160
R7: "2.2kOhms Â±1% 0.063W, 1/16W Chip Resistor 0402 (1005 Metric) Moisture Resistant Thick Film", Manufacturer=FOJAN, Manufacturer Part #=RC0402FR-071KL, ComponentLink1Description="Data Sheet", ComponentLink1URL=https://www.lcsc.com/datasheet/C106235.pdf?spm=wm.sxq.inf.ggs___wm.fly.bg.2.stp&lcsc_vid=T1MKV1cAE1gLBAVfTgIKUgJfTlkPBQBVQlMMBAJURwAxVlNeT1dcVlJVRFlZVzsOAxUeFF5JWBYZEEoKFBINSQcJGk4NBhADEA4cHktXRlhXSQwSGg0%3D, Supplier=LCSC, Supplier Part #=C106235
R8: "RES 3.3kΩ ±1% 62.5mW 0402", Manufacturer=YAGEO, Manufacturer Part #=RC0402FR-074K7L, ComponentLink1Description="Data Sheet", ComponentLink1URL=https://www.lcsc.com/datasheet/C105871.pdf?spm=wm.sxq.inf.ggs___wm.fly.bg.0.stp&lcsc_vid=RFcPU1ZSEVdeBFReRgUKAgZXQAMKBQJURFUIAwVSQVgxVlNeT1dXUFZUTldcVjsOAxUeFF5JWBYZEEoKFBINSQcJGk4NBhADEA4cHktXR1BYSQwSGg0%3D, Supplier=LCSC, Supplier Part #=C105871
R9: library part Resistor_330_0402, "RES 330Ω ±1% 62.5mW 0402", Manufacturer=YAGEO, Manufacturer Part #=RC0402FR-07330RL, ComponentLink1Description="Data Sheet", ComponentLink1URL=https://www.lcsc.com/datasheet/C105875.pdf?spm=wm.sxq.inf.ggs___wm.fly.bg.0.stp&lcsc_vid=RFcPU1ZSEVdeBFReRgUKAgZXQAMKBQJURFUIAwVSQVgxVlNeT1dXUFZUTldcVjsOAxUeFF5JWBYZEEoKFBINSQcJGk4NBhADEA4cHktXR1BYSQwSGg0%3D, Supplier=LCSC, Supplier Part #=C105875
R10 R11 R12: "RES 330Ω ±1% 62.5mW 0402", Manufacturer=YAGEO, Manufacturer Part #=RC0402FR-07330RL, ComponentLink1Description="Data Sheet", ComponentLink1URL=https://www.lcsc.com/datasheet/C105875.pdf?spm=wm.sxq.inf.ggs___wm.fly.bg.0.stp&lcsc_vid=RFcPU1ZSEVdeBFReRgUKAgZXQAMKBQJURFUIAwVSQVgxVlNeT1dXUFZUTldcVjsOAxUeFF5JWBYZEEoKFBINSQcJGk4NBhADEA4cHktXR1BYSQwSGg0%3D, Supplier=LCSC, Supplier Part #=C105875
U1: "Bipolar Motor Driver - Parallel 16-PowerDIP", Manufacturer=ST, ComponentLink1Description="Data Sheet", ComponentLink1URL=https://www.lcsc.com/datasheet/C12340.pdf?spm=wm.sxq.inf.ggs___wm.fly.bg.0.stp&lcsc_vid=QldaXwVWQ1ALVwBSRFNdXlZQFAAIVQZWQQAMUgIAQVkxVlNeT1dWUFZSRlFfVjsOAxUeFF5JWBYZEEoKFBINSQcJGk4%3D, Manufacturer Part#=L293D, Supplier=LCSC, Supplier Part#=C12340
VR1: library part AMS1117_3.3, "72dB@(120Hz) 1A Fixed 3.3V Positive 16V SOT-223 Voltage Regulators - Linear, Low Drop Out (LDO) Regulators ROHS", Manufacturer="Advanced Monolithic Systems", Mfr. Part #=AMS1117-3.3, ComponentLink1Description="New link", ComponentLink1URL=https://www.lcsc.com/product-detail/C6186.html?s_z=n_ASM1117, Splr.part#=C6186, Supplier=LCSC
Y1: "YXC Crystal Oscillators XL7EL89CKI-111YLC-24M", Manufacturer="YXC Crystal Oscillators", Manufacturer Part#=SMD2016-4P, ComponentLink1Description="Data Sheet", ComponentLink1URL=https://www.lcsc.com/datasheet/C2965580.pdf?spm=wm.sxq.inf.ggs___wm.fly.bg.0.stp&lcsc_vid=EVYPBVRQTlZbUwYCRFgKAVAHE1INAl1VRwJdBFRRElcxVlNeQFNdUFxSTldXXjsOAxUeFF5JWBYZEEoKFBINSQcJGk4dAgUUFAk%3D, Supplier=LCSC, Supplier Part#=C2965580

## Free pads (board coordinates)
  round 4 hole 3: 2(117.348,58.039) 2(117.348,99.314) 2(163.068,58.039) 2(163.068,99.314)

## Via types
v1: diameter 0.5, hole 0.2, Top to Bottom Layer, 36 vias
v2: diameter 0.7, hole 0.3, Top to Bottom Layer, tented both sides, 33 vias
v3: diameter 0.7, hole 0.3, Top to Bottom Layer, 1 vias

## Nets (pads, with @x,y where several pads share a name; then routed paths per layer and width w, separated by ;. In a path a pad name is that pad's centre, name@x,y a point inside that pad or via, vN(x,y) a via of type N, cw(c..) or ccw(c..) an arc to the next point about the centre after c; other vN are vias at no path point)
+3V3: *U1.1 *U1.9 *U1.24 *U1.36 *U1.48 C4.1 C7.1 C8.1 C9.2 C10.1 C11.1 C12.1 D3.A P3.5 P4.1 P5.1 P6.1 R2.2 R5.2 VR1.1@142.621,71.925 VR1.2 | length 150.7
  Top w0.2: v2(135.636,87.122) 136.271,86.487 C11.1 136.925,86.439 *U1.1 ; v2@135.763,81.28 135.763,81.393 136.193,81.823 C12.1 136.201,82.431 138.299,82.431 *U1.9 ; *U1.48@138.982,87.118 C10.1@138.982,88.255 ; C10.1 v2(140.335,88.265) ; *U1.24 144.482,79.978 145.289,79.17 C8.1@145.289,78.282 ; *U1.36 145.167,86.449 145.631,86.449 146.264,87.082 146.596,87.082 C9.2 146.715,87.171 147.205,87.661 147.605,87.661 v2(147.701,87.757) ; C8.1 145.295,78.281 146.05,79.036 v2(146.05,79.121)
  Top w0.3: P6.1@125.476,79.629 125.634,79.787 125.634,80.803 127.305,82.474 R5.2 ; VR1.2 142.596,65.211 142.596,63.398 C4.1 C7.1 142.597,61.951 142.597,60.857 v2(142.621,60.833) 142.729,60.833 142.983,61.087 D3.A
  Top w0.7: VR1.1@142.664,71.882 v2(145.415,71.882)
  Int2 (PWR) w0.2: P6.1 127.381,81.28 v2(135.636,81.28) v2(135.636,87.122) 139.192,87.122 v2(140.335,88.265) 140.843,87.757 v2(147.701,87.757) 145.854,85.91 145.854,79.452 146.05,79.256 v2(146.05,79.121)
  Int2 (PWR) w0.7: P4.1 120.507,79.867 121.809,79.867 123.033,78.643 123.033,70.481 123.222,70.292 123.222,69.31 125.222,67.31 135.128,67.31 141.605,60.833 v2(142.621,60.833) 143.764,60.833 145.415,62.484 v2(145.415,71.882) ; 123.033,78.867 123.033,88.206 123.443,88.616 P5.1 125.73,93.726 126.746,94.742 131.826,94.742 132.588,95.504 P3.5 ; 123.317,78.867 124.079,79.629 P6.1
  Bottom Layer w0.3: P3.5 132.588,95.758 133.35,94.996 R2.2
+5V: C2.1 C3.1 C15.1 C16.1 D4.2 D5.2 L1.2 P7.1 P11.1 U1.8 U1.16 VR1.3 | length 88.8
  Top w0.3: U1.16 137.287,60.957 137.59,60.654 C16.1
  Top w0.7: U1.8 120.949,71.247 ; C15.1 120.914,71.212 120.949,71.247 ; D5.2 D4.2 120.949,71.247 ; VR1.3 144.911,62.988 145.415,62.484 v2(147.828,62.484) ; v2(147.828,73.152) 147.877,73.201 C3.1 C2.1 147.853,76.098 147.853,77.089
  Int2 (PWR) w0.7: P7.1 118.139,83.566 117.729,83.156 117.729,71.583 U1.8 123.802,65.509 132.992,65.509 U1.16 139.115,59.386 145.717,59.386 147.828,61.497 v2(147.828,62.484) v2(147.828,73.152) 147.574,73.406 143.637,73.406 142.494,74.549 P11.1
B: P8.1 R9.2 | length 27.2
  Top w0.2: v2(140.208,76.454) 140.208,77.249 140.302,77.343 R9.2@140.335,77.343
  Bottom Layer w0.2: P8.1 128.774,97.086 128.774,96.135 127.889,95.25 127.889,93.853 136.379,85.363 136.379,83.954 136.379,83.264 139.573,80.07 139.573,77.089 v2(140.208,76.454)
CLK-RES: C14.1 R3.1 Y1.3 | length 14.8
  Top w0.2: C14.1 131.015,90.814 Y1.3 130.937,89.26 129.937,88.26 129.937,82.718 130.959,81.696 132.439,81.696 132.839,82.096 132.979,82.096 133.096,82.213 R3.1
G: P8.2 R10.2 | length 26.9
  Top w0.2: v2(139.065,76.454) R10.2
  Bottom Layer w0.2: P8.2@126.365,97.155 126.365,94.742 135.979,85.128 135.979,83.788 135.979,83.534 135.979,83.098 139.084,79.993 139.084,76.473 v2(139.065,76.454)
GND: *U1.8 *U1.23 *U1.35 *U1.49 C1.2 C2.2 C3.2 C4.2 C5.2 C6.1 C7.2 C8.2 C9.1 C10.2 C11.2 C12.2 C13.2 C14.2 C15.2 C16.2 J1.5 J1.SH1 J1.SH2 J1.SH3 J1.SH4 J1.SH5 J1.SH6 P1.1 P2.3 P3.1 P4.2 P5.2 P6.3 P7.2 P8.4 P9.2 P10.2 P11.2 R1.1 R4.2 R6.1 R8.1 U1.4 U1.5 U1.12 U1.13 VR1.1@140.331,65.235 Y1.2 Y1.4 | length 79.3
  Top w0.2: U1.13 131.191,59.69 C16.2 ; R6.1@129.667,77.515 v2(129.667,78.308) ; Y1.4 130.937,83.574 130.683,83.32 v2(130.683,83.185) 130.733,83.135 131.152,83.135 131.269,83.017 C13.2 ; C14.2@132.08,92.647 133.413,92.647 v2(133.477,92.71) Y1.2 ; v2(133.35,78.613) R8.1 ; v2(134.874,83.282) 134.97,83.186 135.214,83.186 135.294,83.106 ; C12.2 135.294,82.462 135.294,83.106 ; C11.2 136.891,87.361 136.891,88.377 v2(136.906,88.392) ; v2@136.955,88.343 136.969,88.328 138.063,88.328 C10.2 ; *U1.8 136.587,82.939 136.42,83.106 135.294,83.106 ; VR1.1@140.331,65.235 140.331,65.425 140.696,65.79 141.482,65.79 v2(142.494,66.802) 142.557,66.802 143.432,65.927 C4.2 C7.2 ; R4.2 142.143,76.678 142.643,76.178 C6.1 ; C6.1@143.637,76.2 v2(145.415,76.2) ; *U1.23 143.992,80.254 143.992,79.758 144.152,79.597 144.152,79.506 144.402,79.256 v2(144.402,79.121) ; *U1.35 145.687,85.939 146.059,86.311 C9.1@146.678,86.311 ; C8.2 145.351,77.357 145.351,76.263 v2(145.415,76.2) ; C1.2 146.844,77.213 146.844,76.39 146.874,76.36 146.874,76.216 C2.2 C2.2@146.875,76.073 ; C9.1 147.285,86.311 147.764,86.79 v2(147.764,86.804) ; C2.2@146.826,76.136 145.478,76.136 v2(145.415,76.2) ; C3.2@146.841,74.676 146.304,74.676 145.415,75.565 v2(145.415,76.2) ; R1.1 v2(151.13,63.754) 155.956,63.754 P1.1 ; v2(155.702,85.725) 155.722,85.705 J1.5@158.135,85.705
  Top w0.3: C15.2 118.95,76.22 119.126,76.396 119.576,76.396 P4.2 ; J1.5@158.115,85.725 158.115,87.32 J1.SH2 160.61,87.585 J1.SH3@160.782,87.757 ; J1.SH1@158.369,81.026 160.764,81.026 J1.SH6 ; J1.SH6@160.83,80.947 J1.SH5 J1.SH4 J1.SH3@160.83,87.757
  Bottom Layer w0.2: v2(133.477,92.71) 133.477,93.609 133.594,93.726 C5.2
  other v1: 139.232,81.189 140.232,81.189 141.232,81.189 142.232,81.189 143.232,81.189 144.232,81.189 139.232,82.189 140.232,82.189 141.232,82.189 142.232,82.189 143.232,82.189 144.232,82.189 139.232,83.189 140.232,83.189 141.232,83.189 142.232,83.189 143.232,83.189 144.232,83.189 139.232,84.189 140.232,84.189 141.232,84.189 142.232,84.189 143.232,84.189 144.232,84.189 139.232,85.189 140.232,85.189 141.232,85.189 142.232,85.189 143.232,85.189 144.232,85.189 139.232,86.189 140.232,86.189 141.232,86.189 142.232,86.189 143.232,86.189 144.232,86.189
"MCU _OSC_IN": *U1.5 C13.1 Y1.1 | length 8.6
  Top w0.2: C13.1 132.129,84.377 132.588,84.836 Y1.1 ; 137.635,84.639 137.826,84.449 138.297,84.449 *U1.5
  Top w0.3: Y1.1 137.438,84.836 137.635,84.639
"MCU _OSC_OUT": *U1.6 R3.2 | length 5.4
  Top w0.2: R3.2@133.858,82.931 133.879,82.931 134.079,83.131 134.079,83.406 135.012,84.339 137.299,84.339 137.689,83.949 138.297,83.949 *U1.6
MCU_BOOT0: *U1.20 R4.1 | length 2.3
  Top w0.2: R4.1 142.143,79.181 142.482,79.52 *U1.20
MCU_NRST: *U1.7 C5.1 P3.4 R2.1 | length 15.7
  Top w0.3: v2(137.029,83.689) 137.138,83.689 137.388,83.439 *U1.7
  Bottom Layer w0.3: C5.1 135.101,89.207 137.029,87.279 v2(137.029,83.689) ; C5.1@135.102,93.727 R2.1 R2.1 135.103,97.13 P3.4
MCU_PA0: *U1.10 P6.2 R5.1 | length 16.8
  Top w0.3: P6.2@125.476,77.089 126.746,77.089 129.032,79.375 R5.1@129.032,81.46 ; R5.1@129.062,81.61 130.408,81.61 131.373,80.645 133.889,80.645 133.954,80.58 136.206,80.58 137.565,81.939 *U1.10
MCU_PA1: *U1.11 P4.3 R6.2 | length 23
  Top w0.2: P4.3 123.506,74.549 124.846,75.889 129.483,75.889 129.667,76.073 R6.2 129.717,76.556 130.658,76.556 131.176,77.074 131.176,80.013 131.358,80.195 133.703,80.195 133.768,80.13 136.392,80.13 137.692,81.429 138.297,81.429 *U1.11
MCU_PA2: *U1.12 P5.3 | length 16.4
  Top w0.2: v2(131.826,79.545) 135.648,79.545 135.833,79.73 136.558,79.73 136.877,80.049 137.117,80.049 138.007,80.939 *U1.12
  Bottom Layer w0.3: P5.3 125.73,81.733 126.084,81.379 126.982,81.379 127.48,80.881 127.48,79.922 127.857,79.545 v2(131.826,79.545)
MCU_PA3: *U1.13 R7.1 R8.2 | length 5.4
  Top w0.3: R7.1 135.382,78.643 136.019,79.28 136.744,79.28 137.063,79.599 137.356,79.599 138.021,80.264 *U1.13@138.957,80.264
MCU_PA4: *U1.14 P11.3 | length 8.5
  Top w0.3: P11.3 136.439,76.368 136.439,78.604 136.615,78.78 136.952,78.78 137.271,79.099 137.563,79.099 137.927,79.463 138.681,79.463 138.707,79.489 139.179,79.489 139.482,79.792 *U1.14@139.482,79.989
MCU_PA5: *U1.15 R11.1 | length 3.7
  Top w0.2: R11.1 137.807,78.283 137.977,78.453 137.977,78.877 138.094,78.994 139.446,78.994 139.932,79.48 139.932,79.799 139.972,79.839 139.972,80.254 *U1.15
MCU_PA6: *U1.16 R10.1 | length 2.8
  Top w0.2: R10.1 139.184,78.402 139.618,78.402 139.735,78.519 139.735,78.717 140.343,79.325 140.343,79.644 140.472,79.773 140.472,80.254 *U1.16
MCU_PA7: *U1.17 R9.1 | length 2.2
  Top w0.2: R9.1 140.335,78.752 140.743,79.16 140.743,79.478 140.972,79.708 140.972,80.254 *U1.17
MCU_PA9: *U1.30 P2.1 | length 20.4
  Top w0.2: *U1.30 145.943,83.439 146.443,82.939 v2(146.504,82.939)
  Bottom Layer w0.3: v2(146.504,82.939) 146.504,83.847 158.161,95.504 P2.1
MCU_PA10: *U1.31 P2.2 | length 18.7
  Top w0.2: *U1.31 148.074,83.939 v2(148.082,83.947)
  Bottom Layer w0.3: v2(148.082,83.947) 148.111,83.976 148.111,84.747 156.328,92.964 P2.2
MCU_PB0: *U1.18 U1.1 | length 12.4
  Top w0.2: U1.1 137.669,70.187 138.095,70.187 141.132,73.224 141.132,78.983 141.143,78.994 141.143,79.313 141.472,79.642 141.472,80.254 *U1.18
MCU_PB1: *U1.19 R12.1 | length 24.2
  Top w0.2: v2(141.844,76.058) 141.844,76.193 141.543,76.494 141.543,79.147 141.982,79.586 *U1.19
  Top w0.3: v2(146.812,91.059) R12.1
  Bottom Layer w0.3: v2(141.844,76.058) 141.826,76.058 141.163,76.721 141.163,78.272 143.48,80.589 144.481,80.589 145.304,81.412 145.304,86.884 146.812,88.392 v2(146.812,91.059)
MCU_PB10: *U1.21 P10.1 | length 25
  Top w0.2: *U1.21 142.992,80.254 142.992,79.131 v2(143.002,79.121)
  Bottom Layer w0.3: v2(143.002,79.121) 143.97,80.089 144.688,80.089 145.804,81.205 145.804,83.854 155.956,94.006 P10.1
MCU_PB12: *U1.25 U1.2 | length 22.5
  Top w0.3: *U1.25 146.483,80.939 146.989,80.432 146.989,79.833 v2(147.066,79.756)
  Bottom Layer w0.3: U1.2 134.747,71.247 135.382,71.882 143.383,71.882 147.066,75.565 v2(147.066,79.756)
MCU_PB13: *U1.26 U1.7 | length 39.4
  Top w0.3: *U1.26 147.352,81.439 v3(148.209,82.296)
  Bottom Layer w0.3: U1.7 123.022,68.83 141.165,68.83 148.336,76.001 148.336,78.586 148.209,78.713 v3(148.209,82.296)
MCU_SWCLK: *U1.37 P3.3 | length 12.9
  Top w0.3: P3.3 137.699,97.124 137.699,95.981 144.482,89.198 *U1.37
MCU_SWDIO: *U1.34 P3.2 | length 18
  Top w0.3: P3.2 140.493,96.87 140.493,95.981 148.717,87.757 148.717,86.741 147.44,85.464 145.182,85.464 *U1.34
MCU_VCAP: *U1.22 C6.2 | length 2.4
  Top w0.3: *U1.22 143.482,79.631 143.702,79.411 143.702,78.043 C6.2
Motor+: D4.1 P12.1 U1.3 | length 12.8
  Top w0.7: D4.1 129.286,71.247 130.594,72.555 130.594,73.825 P12.1@131.064,74.295
  Int2 (PWR) w0.7: P12.1 131.318,70.694 U1.3
Motor-: D5.1 P12.2 U1.6 | length 11.5
  Top w0.7: D5.1 126.403,72.644 127.304,73.545 127.774,73.545 P12.2@128.524,74.295
  Int2 (PWR) w0.7: U1.6@124.601,69.819 125.762,70.98 127.749,70.98 128.778,72.009 P12.2
MQ-9_D0: P7.3 R7.2 | length 21.6
  Top w0.3: v2(133.477,77.47) R7.2
  Bottom Layer w0.3: P7.3@119.888,88.646 120.143,88.391 121.413,88.391 124.079,85.725 124.079,82.677 125.877,80.879 126.775,80.879 126.98,80.674 126.98,79.715 127.687,79.008 129.957,79.008 131.495,77.47 v2(133.477,77.47)
NetP9_1: P9.1 R12.2 | length 3.6
  Top w0.2: P9.1@146.685,96.901 146.812,96.774 R12.2
PWR_LED_RES: D3.C R1.2 | length 3.4
  Top w0.2: D3.C 147.809,61.163 R1.2
R: P8.3 R11.2 | length 28.2
  Top w0.2: R11.2 137.795,76.843 138.049,76.589 v2(138.049,76.454)
  Bottom Layer w0.2: P8.3@123.825,97.155 124.464,96.516 124.464,95.881 135.579,84.766 135.579,82.932 138.684,79.828 138.684,77.089 v2(138.049,76.454)
SD_out: C1.1 D1.2 D2.2 L1.1 | length 6.4
  Top w0.7: C1.1 L1.1 147.828,78.942 149.202,80.316 D1.2 ; D2.2 149.236,82.897 149.236,81.034 D1.2@149.215,81.013
ST-D2: D1.1 P1.2 | length 14.8
  Top w0.7: D1.1 153.035,81.026 154.432,79.629 154.432,73.406 P1.2
USB_D_N: *U1.32 J1.2 | length 13.4
  Top w0.2: *U1.32 145.471,84.439 145.521,84.489 146.749,84.489 146.857,84.597 150.98,84.597 151.717,83.86 157.463,83.86 157.488,83.835 158.055,83.835 J1.2
USB_D_P: *U1.33 J1.3 | length 13.4
  Top w0.2: *U1.33 145.471,84.939 145.521,84.889 146.583,84.889 146.691,84.997 151.146,84.997 151.883,84.26 157.463,84.26 157.488,84.285 158.055,84.285 J1.3
VBUS: D2.1 J1.1 | length 7.4
  Top w0.3: 157.38,82.985 157.43,83.035 158.105,83.035 J1.1
  Top w0.7: D2.1 150.826,82.985 157.38,82.985
pads on no net: *U1.2 *U1.3 *U1.4 *U1.27 *U1.28 *U1.29 *U1.38 *U1.39 *U1.40 *U1.41 *U1.42 *U1.43 *U1.44 *U1.45 *U1.46 *U1.47 J1.4 U1.9 U1.10 U1.11 U1.14 U1.15

## Polygon pours and split planes (outlines as drawn)
GND on Int1 (GND) "NONET_L-01_P-001" (solid, remove dead copper, pour order 0): 163.265,102.105 cw(c163.265,99.565) 165.805,99.565 165.805,57.909 cw(c163.265,57.909) 163.265,55.369 116.529,55.369 cw(c116.529,57.909) 113.989,57.909 113.989,99.565 cw(c116.529,99.565) 116.529,102.105 136.849,102.105

## Silkscreen, mask and mechanical layers (free items; w line width, h text height)
Top Overlay:
  lines w0.06: 118.872,73.279 121.793,73.279 121.793,81.153 118.872,81.153 118.872,73.279 ; 120.015,95.885 130.175,95.885 130.175,98.425 120.015,98.425 120.015,95.885 ; 124.46,73.279 127,73.279 127,80.899 124.46,80.899 124.46,73.279 ; 124.46,82.169 127,82.169 127,89.916 124.46,89.916 124.46,82.169 ; 127.508,73.025 132.715,73.025 132.715,75.565 127.508,75.565 127.508,73.025 ; 133.35,73.279 140.97,73.279 140.97,75.819 133.35,75.819 133.35,73.279 ; 145.415,95.885 150.495,95.885 150.495,98.552 145.415,98.552 145.415,95.885 ; 152.146,95.885 157.226,95.885 157.226,98.425 152.146,98.425 152.146,95.885 ; 158.369,89.154 160.909,89.154 160.909,96.901 158.369,96.901 158.369,89.154
  text "GND" at 121.82,99.087 h0.4 r180
  text "R" at 124.106,99.087 h0.4 r180
  text "G" at 126.773,99.087 h0.4 r180
  text "B" at 129.313,99.087 h0.4 r180
  text "VCC" at 132.996,99.087 h0.4 r180
  text "NRST" at 135.917,99.087 h0.4 r180
  text "SWCLK" at 138.457,99.087 h0.4 r180
  text "SWDIO" at 140.997,99.087 h0.4 r180
  text "GND" at 143.283,99.087 h0.4 r180
  text "VCC" at 146.966,99.087 h0.4 r180
  text "GND" at 149.633,99.087 h0.4 r180
  text "GND" at 153.824,99.087 h0.4 r180
  text "VCC" at 156.364,99.087 h0.4 r180
  text "RGB" at 129.694,95.531 h0.4 r180
  text "ST-Link" at 143.664,95.404 h0.4 r180
  text "LED" at 150.395,95.404 h0.4 r180
  text "Buz" at 156.872,95.277 h0.4 r180
  text "RX" at 161.571,95.223 h0.4 r90
  text "TX" at 161.571,92.429 h0.4 r90
  text "MQ-9" at 119.353,90.397 h0.4
  text "PIR" at 125.068,90.397 h0.4
  text "GND" at 161.571,89.762 h0.4 r90
  text "UART" at 158.015,89.635 h0.4 r90
  text "D0/A0" at 118.21,89.562 h0.4 r270
  text "VCC" at 123.671,89.054 h0.4 r270
  text "GND" at 123.671,86.641 h0.4 r270
  text "GND" at 118.21,86.514 h0.4 r270
  text "D0" at 123.671,84.228 h0.4 r270
  text "VCC" at 118.21,84.101 h0.4 r270
  text "LDR" at 119.861,81.38 h0.4
  text "DHT11" at 124.941,81.253 h0.4
  text "VCC" at 123.798,80.291 h0.4 r270
  text "VCC" at 118.083,80.164 h0.4 r270
  text "GND" at 118.083,77.624 h0.4 r270
  text "Data" at 123.671,77.624 h0.4 r270
  text "Servo" at 133.577,75.919 h0.4
  text "motor" at 127.608,75.665 h0.4
  text "GND" at 123.798,74.83 h0.4 r270
  text "D0" at 118.083,74.703 h0.4 r270
  text "D0" at 133.704,72.617 h0.4
  text "GND" at 136.752,72.617 h0.4
  text "VCC" at 139.165,72.617 h0.4
  text "-" at 128.624,72.163 h0.4
  text "+" at 131.164,72.169 h0.4
  text "5V" at 164.619,69.696 h0.4 r90
  text "GND" at 164.492,64.489 h0.4 r90
Mechanical 1:
  lines w0.06: 113.411,56.261 ccw(c114.681,56.261) 114.681,54.991 119.253,54.991 165.227,54.991 ccw(c165.227,56.261) 166.497,56.261 166.497,92.964 166.497,101.219 ccw(c165.227,101.219) 165.227,102.489 133.477,102.489 114.681,102.489 ccw(c114.681,101.219) 113.411,101.219 113.411,94.869 113.411,56.261